# Altium PCB Sensor_Interface.PcbDoc
Units mm, origin at the board's own origin, x right, y up, seen from the top; angles counter-clockwise.
Board outline 37.26 x 27.41 mm, 2 copper layers (Top Layer, Bottom Layer), stack 1.595 mm thick; 15 components, 28 nets, 104 pads, 47 vias.
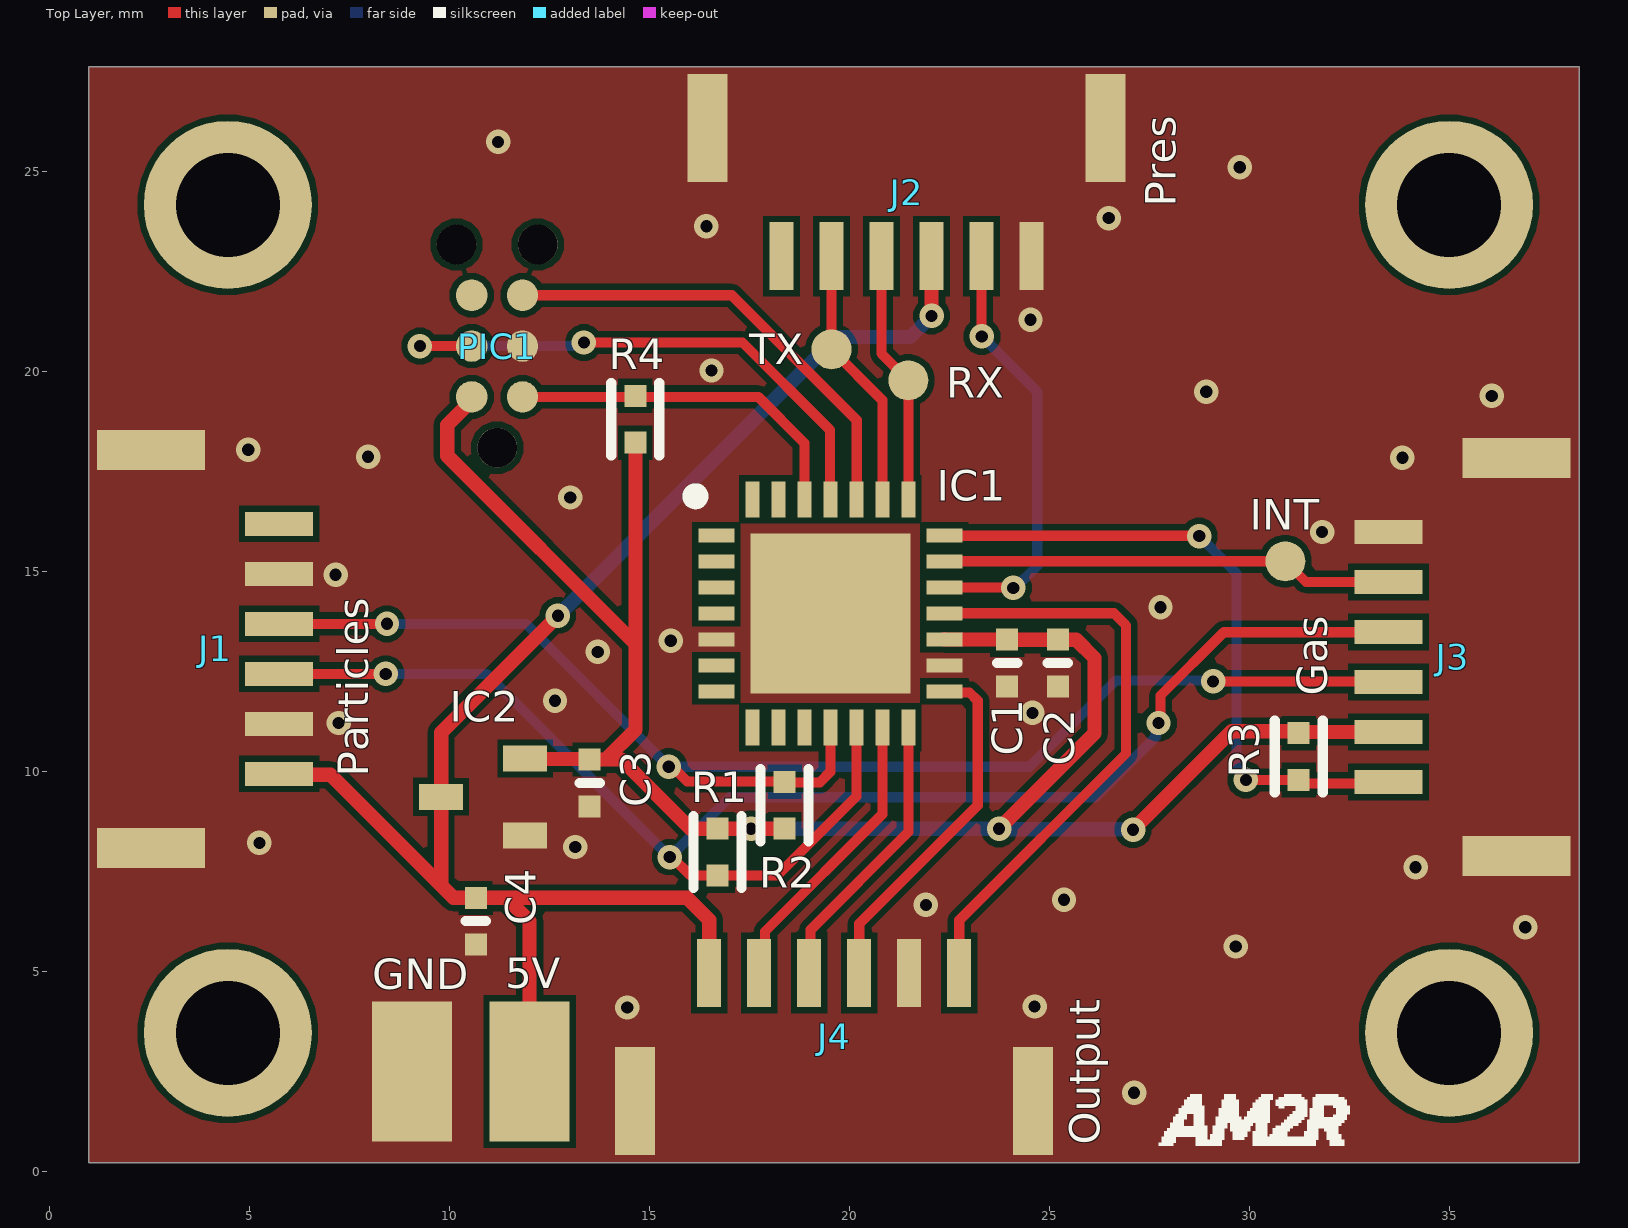
[diagram p0: Top Layer view]
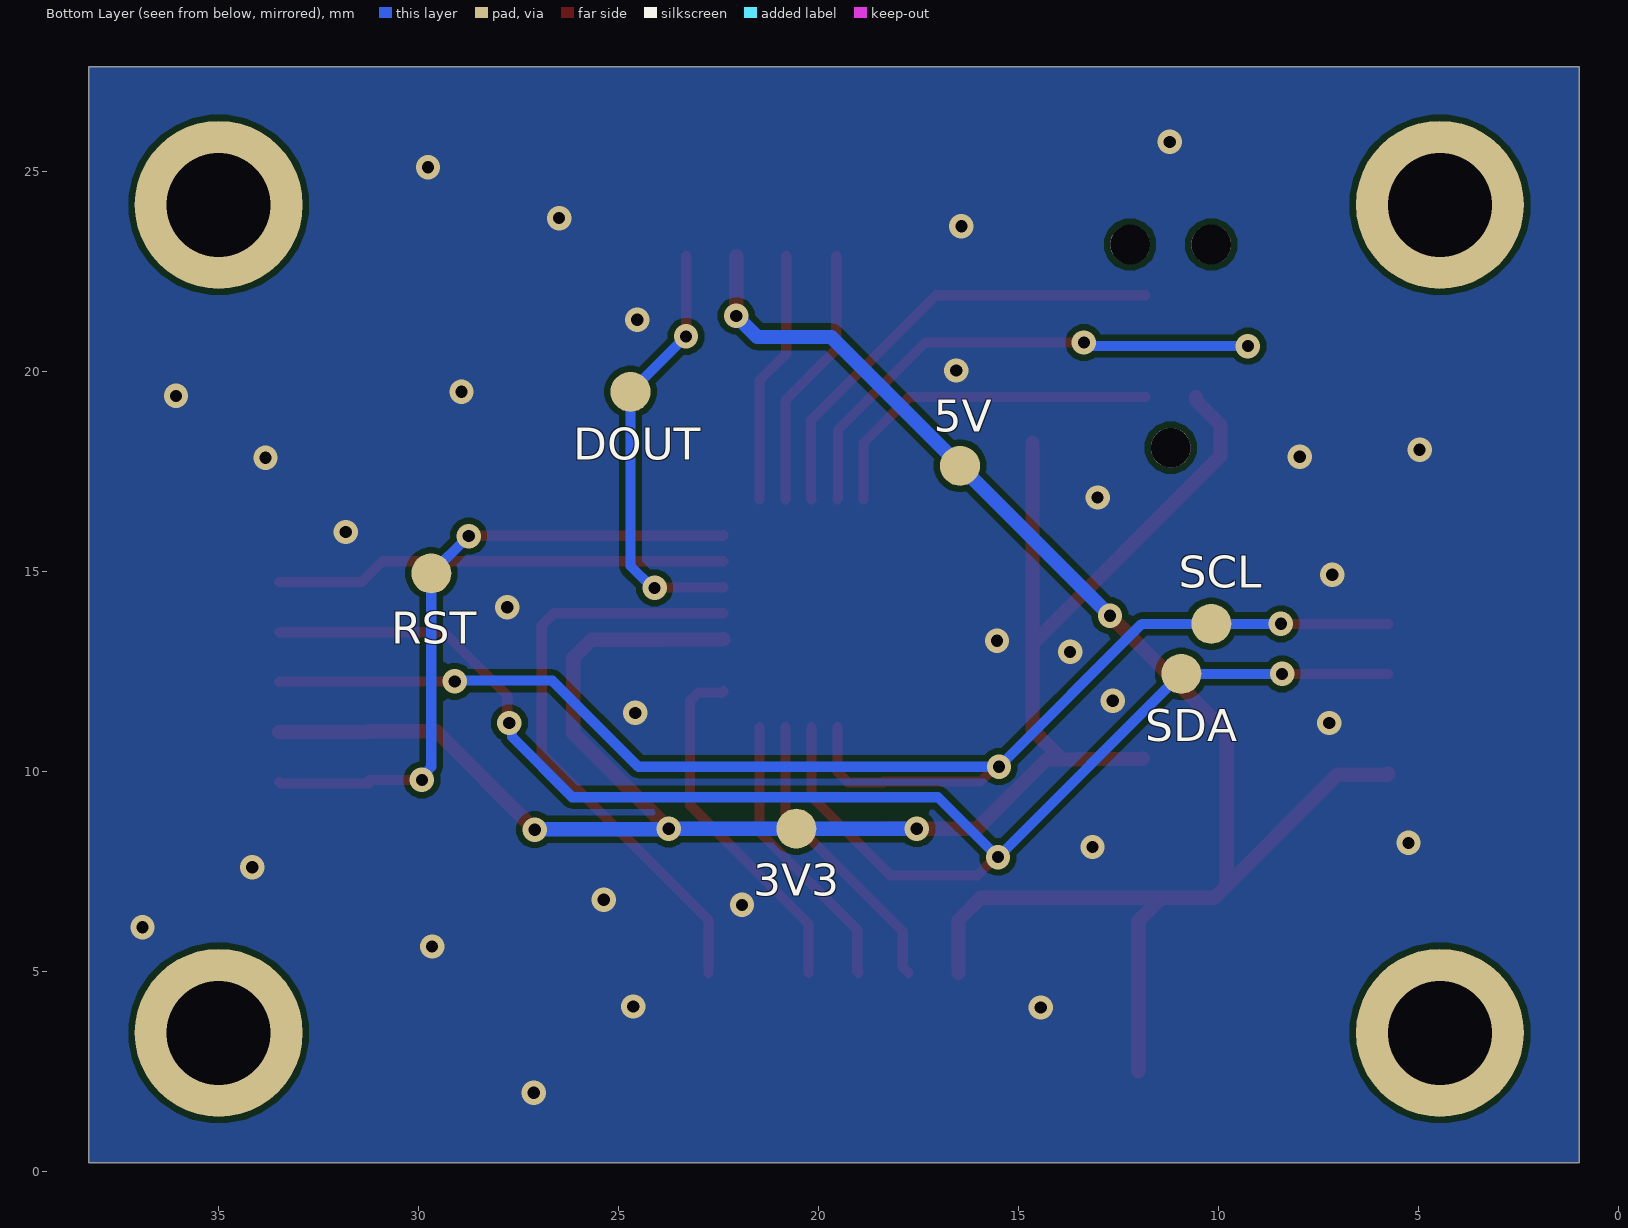
[diagram p1: Bottom Layer view, seen from below]
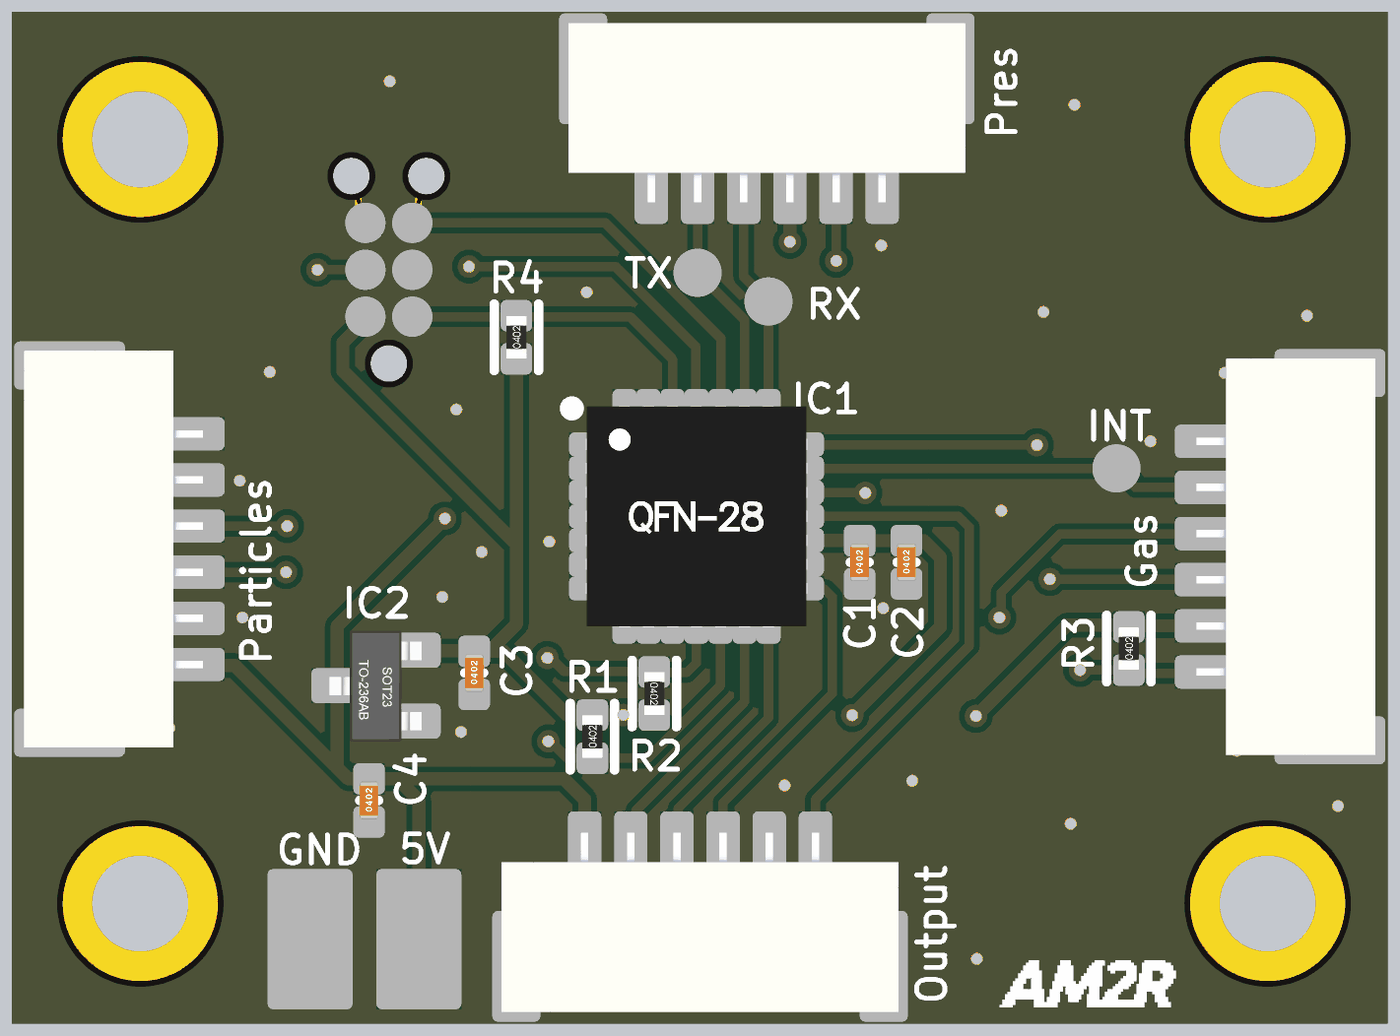
[diagram p2: 3D render of the assembled board from above, using the file's embedded part models]

## Layer stack, top to bottom
Top Solder: solder mask 0.0254, Solder Resist, Dk 3.5
Top Layer: signal copper 0.0356
Dielectric 1: core 1.524, FR-4, Dk 4.6
Bottom Layer: signal copper 0.0356
Bottom Solder: solder mask 0.0254, Solder Resist, Dk 3.5

## Board outline
0.991,0.203 38.252,0.203 38.252,27.61 0.991,27.61

## Design rules (kind name [scope] priority, off if disabled: settings)
Clearance [All] p1: gap=0.152 ignorepadtopadclearanceinfootprint=FALSE except(0: Arc-Hole Track-Hole SMDPad-Hole THPad-Hole Via-Hole Fill-Hole Poly-Hole Region-Hole Text-Hole)
ComponentClearance [All] p1: gap=0.254 collisioncheckmode=3 verticalgap=0.254 showdistances=TRUE
HoleSize [All] p1: absolutevalues=TRUE maxlimit=5.08 minlimit=0.3 maxpercent=80.000 minpercent=20.000
HoleToHoleClearance [All] p1: gap=0.55 allowstackedmicrovias=TRUE
MinimumSolderMaskSliver [All] p1: minsoldermaskwidth=0.152
PasteMaskExpansion [All] p1: expansion=0.152
PlaneConnect [All] p1: planeconnectstyle=Direct reliefexpansion=0.508 reliefentries=4 reliefconductorwidth=0.254 reliefairgap=0.254
PolygonConnect [All] p1: connectstyle=Direct reliefconductorwidth=0.254 reliefentries=4 polygonreliefangle="90 Angle" airgapwidth=0.254
RoutingTopology [All] p1: topology=Daisy_Balanced
RoutingVias [All] p1: holewidth=0.305 width=0.61 viastyle="Through Hole" minholewidth=0.305 minwidth=0.61 maxholewidth=1.27 maxwidth=2.54
SilkToBoardRegionClearance SilkToBoardRegionClearance_1 [All] p2:
SilkToSilkClearance [All] p1: silktosilkclearance=0.152
SilkToSolderMaskClearance [IsPad] p1: minsilkscreentomaskgap=0.152 clearancetoexposedcopper=TRUE
SolderMaskExpansion [All] p1: expansion=0.152 istentingtop=FALSE
Width [All] p1: maxlimit=2.54 minlimit=0.152 preferedwidth=0.254
21 further rules are at their usual default settings.

## Classes and differential pairs
component class U_MCP1700T-3302: C3 C4 IC2
component class U_PIC18F27K42-I_ML: C1 C2 IC1 IC? PIC1 PIC? R4
component class U_Connectors: J1 J2 J3 J4 R1 R2 R3

## Components (designator, comment, footprint, x,y, rotation, side; value= is the part's Value field where it differs from the comment)
C1 "0.10µF" SMD-0402C 23.952,12.7 r0 top
C2 "1µF" SMD-0402C 25.222,12.7 r0 top
C3 "1µF" SMD-0402C 13.513,9.703 r0 top
C4 "1µF" SMD-0402C 10.668,6.248 r0 top
IC1 "PIC18F27K42-I_ML" QFN28_6x6 19.533,13.945 r0 top
IC2 "MCP1700T-3302E_TT" SOT23 10.719,9.601 r180 top
J1 "SM06B-GHS-TB__LF__SN_" SM06BGHSTBLFSN 3.48,13.056 r270 top
J2 "SM06B-GHS-TB__LF__SN_" SM06BGHSTBLFSN 21.438,25.146 r180 top
J3 "SM06B-GHS-TB__LF__SN_" SM06BGHSTBLFSN 35.763,12.852 r90 top
J4 "SM06B-GHS-TB__LF__SN_" SM06BGHSTBLFSN 19.63,2.678 r0 top
PIC1 "TC2030-CTX-NL" TC2030 11.402,20.625 r90 top
R1 "10k" SMD-0402-RES 16.713,7.976 r0 top
R2 "10k" SMD-0402-RES 18.39,9.144 r180 top
R3 "10k" SMD-0402-RES 31.242,10.363 r0 top
R4 "4.7k" SMD-0402-RES 14.656,18.796 r0 top

## Footprints (in the part's own frame and the unit in brackets; to place one, negate y for a bottom-side part, rotate by r counter-clockwise, add the part's x,y. Pads: shape width x height; smd on the part's side, far side on the other; paste and mask are expansions set on the pad)
QFN28_6x6 [mm]
  rect 0.9x0.35 smd: 1(-2.85,1.95) 2(-2.85,1.3) 3(-2.85,0.65) 4(-2.85,0) 5(-2.85,-0.65) 6(-2.85,-1.3) 7(-2.85,-1.95) 15(2.85,-1.95) 16(2.85,-1.3) 17(2.85,-0.65) 18(2.85,0) 19(2.85,0.65) 20(2.85,1.3) 21(2.85,1.95)
  rect 0.35x0.9 smd: 8(-1.95,-2.85) 9(-1.3,-2.85) 10(-0.65,-2.85) 11(0,-2.85) 12(0.65,-2.85) 13(1.3,-2.85) 14(1.95,-2.85) 22(1.95,2.85) 23(1.3,2.85) 24(0.65,2.85) 25(0,2.85) 26(-0.65,2.85) 27(-1.3,2.85) 28(-1.95,2.85)
  rect 4x4 smd: 29(0,0)
  silkscreen extent -3.54,2.76 -3.21,3.09, body extent -3,-3 3,3, height 1.02
SM06BGHSTBLFSN [mm]
  rect 0.6x1.7 smd: 1(3.125,2.275) 2(1.875,2.275) 3(0.625,2.275) 4(-0.625,2.275) 5(-1.875,2.275) 6(-3.125,2.275)
  rect 1x2.7 smd: MP1(4.975,-0.925) MP2(-4.975,-0.925)
  body extent -5.38,-2.16 5.38,2.69, height 4.27
SMD-0402-RES [mm]
  rect 0.55x0.55 smd: 1(0,0.584) 2(0,-0.584)
  silkscreen extent -0.6,-0.9 0.6,0.9, body extent -0.28,-0.57 0.27,0.58, height 0.41
SMD-0402C [mm]
  rect 0.55x0.55 smd: 1(0,0.584) 2(0,-0.584)
  silkscreen extent -0.25,0 0.25,0, body extent -0.25,-0.51 0.25,0.51, height 0.51
SOT23 [mm]
  rect 1.1x0.65 smd: 1(-1.184,1.206) 2(-1.184,-0.714) 3(0.916,0.246)
  body extent -1.38,-1.25 1.12,1.75, height 1.09
TC2030 [mm]
  rrect100% 0.787x0.787 smd: 1(-1.27,-0.434) 2(-1.27,0.836) 3(0,-0.434) 4(0,0.836) 5(1.27,-0.434) 6(1.27,0.836)
  round 0.991 hole 0.991 unplated: MH1(-2.54,0.201) MH2(2.54,1.217) MH3(2.54,-0.815)

## Part data
C1: library part GCM155R71C104KA55D, "CAP CER 0.1UF 16V X7R 0402", Digi-Key Part Number=490-4759-1-ND, Manufacturer="Murata Electronics North America", Operating Temperature="-55°C ~ 125°C", Package / Case="0402 (1005 Metric)", Ratings=AEC-Q200, Temperature Coefficient=X7R, Tolerance=±10%, Voltage=16V, @ qty=0, Applications=Automotive, Datasheets=http://www.murata.com/~/media/webrenewal/support/library/catalog/products/capacitor/mlcc/c03e.ashx, Factory Stock=0, Features=-, Height - Seated (Max)=-, Image=//media.digikey.com/Renders/Murata%20Renders/ZRB-SERIES-0402.jpg, Lead Spacing=-, Lead Style=-, Minimum Quantity=1, Mounting Type="Surface Mount, MLCC", Packaging="Cut Tape (CT)", Part Number=GCM155R71C104KA55D, Part Status=Active, Quantity Available=734194, Series=GCM, Size / Dimension="0.039\" L x 0.020\" W (1.00mm x 0.50mm)", Thickness (Max)="0.022\" (0.55mm)", Unit Price (USD)=0.1
C2 C3 C4: library part GCM155C71A105KE38D, "CAP CER 1UF 10V X7S 0402", Digi-Key Part Number=490-13409-1-ND, Manufacturer="Murata Electronics North America", Operating Temperature="-55°C ~ 125°C", Package / Case="0402 (1005 Metric)", Ratings=AEC-Q200, Temperature Coefficient=X7S, Tolerance=±10%, Voltage=10V, @ qty=0, Applications=Automotive, Datasheets=http://www.murata.com/~/media/webrenewal/support/library/catalog/products/capacitor/mlcc/c03e.ashx, Factory Stock=0, Features=-, Height - Seated (Max)=-, Image=//media.digikey.com/Renders/Murata%20Renders/ZRB-SERIES-0402.jpg, Lead Spacing=-, Lead Style=-, Minimum Quantity=1, Mounting Type="Surface Mount, MLCC", Packaging="Cut Tape (CT)", Part Number=GCM155C71A105KE38D, Part Status=Active, Quantity Available=7240, Series=GCM, Size / Dimension="0.039\" L x 0.020\" W (1.00mm x 0.50mm)", Thickness (Max)="0.022\" (0.55mm)", Unit Price (USD)=0.12
IC1: "8-bit Microcontrollers", Manufacturer_Name=Microchip, Manufacturer_Part_Number=PIC18F27K42-I/ML, DeviceSetName=PIC18F27K42-I_ML, GateName_1=G$1, Height=1mm, LibraryName=PIC18F27K42-I_ML, Mouser_Part_Number=579-PIC18F27K42-I/ML, Mouser_Price-Stock=https://www.mouser.com/Search/Refine.aspx?Keyword=579-PIC18F27K42-I%2FML, SymbolName_1=PIC18F27K42-I_ML
IC2: library part MCP1700T-3302, "LDO Voltage Regulator 250mA 3.3V", Manufacturer_Name=Microchip, Manufacturer_Part_Number=MCP1700T-3302E/TT, Allied_Number=70046119, Allied_Price-Stock=http://www.alliedelec.com/microchip-technology-inc-mcp1700t-3302e-tt/70046119/, DeviceSetName=MCP1700T-3302E_TT, GateName_1=G$1, Height=1.12mm, LibraryName=MCP1700T-3302E_TT, Mouser_Part_Number=579-MCP1700T3302E/TT, Mouser_Price-Stock=https://www.mouser.com/Search/Refine.aspx?Keyword=579-MCP1700T3302E%2FTT, RS_Part_Number=6989044P, RS_Price-Stock=http://uk.rs-online.com/web/p/products/6989044P, SymbolName_1=MCP1700T-3302E_TT
J1 J2 J3 J4: "Conn Shrouded Header HDR 6 POS 1.25mm Solder RA Side Entry SMD T/R   Source:  Datasheet", Manufacturer_Name="JST (JAPAN SOLDERLESS TERMINALS)", Manufacturer_Part_Number="SM06B-GHS-TB (LF)(SN)", Arrow_Part_Number="SM06B-GHS-TB (LF)(SN)", Arrow_Price-Stock=https://www.arrow.com/en/products/sm06b-ghs-tb-lf-sn/jst-manufacturing, DeviceSetName=SM06B-GHS-TB__LF__SN_, GateName_1=G$1, Height=4.25mm, LibraryName=SM06B-GHS-TB__LF__SN_, SymbolName_1=SM06B-GHS-TB__LF__SN_
PIC1: "6-Pin \"No Legs\" Cable with 10-pin micro-connector for Cortex processors", Manufacturer_Name="Tag Connect", DeviceSetName=TC2030-CTX-NL, GateName_1=G$1, Height=18mm, LibraryName=TC2030-CTX-NL, Manufacturer_Part_Number=TC2030-CTX-NL, SymbolName_1=TC2030-CTX-NL
R1 R2 R3: library part ERJ-2GEJ103X, "RES SMD 10K OHM 5% 1/10W 0402", Digi-Key Part Number=P10KJCT-ND, Manufacturer="Panasonic Electronic Components", Operating Temperature="-55°C ~ 155°C", Package / Case="0402 (1005 Metric)", Power (Watts)="0.1W, 1/10W", Supplier Device Package=0402, Temperature Coefficient=±200ppm/°C, Tolerance=±5%, @ qty=1500, Composition="Thick Film", Datasheets=http://industrial.panasonic.com/www-cgi/jvcr13pz.cgi?E+PZ+3+AOA0001+ERJ2GEJ103X+7+WW, Factory Stock=0, Failure Rate=-, Features="Automotive AEC-Q200", Height - Seated (Max)="0.016\" (0.40mm)", Image=//media.digikey.com/Photos/Panasonic%20Photos/ERJ-PA2-Series.jpg, Minimum Quantity=1, Number of Terminations=2, Packaging="Cut Tape (CT)", Part Number=ERJ-2GEJ103X, Part Status=Active, Quantity Available=2560215, Series=ERJ, Size / Dimension="0.039\" L x 0.020\" W (1.00mm x 0.50mm)", Unit Price (USD)=0.00350
R4: library part ERJ-2RKF4701X, "RES SMD 4.7K OHM 1% 1/10W 0402", Digi-Key Part Number=P4.70KLCT-ND, Manufacturer="Panasonic Electronic Components", Operating Temperature="-55°C ~ 155°C", Package / Case="0402 (1005 Metric)", Power (Watts)="0.1W, 1/10W", Supplier Device Package=0402, Temperature Coefficient=±100ppm/°C, Tolerance=±1%, @ qty=1500, Composition="Thick Film", Datasheets=http://industrial.panasonic.com/www-cgi/jvcr13pz.cgi?E+PZ+3+AOA0002+ERJ2RKF4701X+7+WW, Factory Stock=0, Failure Rate=-, Features="Automotive AEC-Q200", Height - Seated (Max)="0.016\" (0.40mm)", Image=//media.digikey.com/Photos/Panasonic%20Photos/ERJ-PA2-Series.jpg, Minimum Quantity=1, Number of Terminations=2, Packaging="Cut Tape (CT)", Part Number=ERJ-2RKF4701X, Part Status=Active, Quantity Available=1881807, Series=ERJ, Size / Dimension="0.039\" L x 0.020\" W (1.00mm x 0.50mm)", Unit Price (USD)=0.00496

## Free pads (board coordinates)
  round 4.2 hole 2.6: 3(4.47,3.454) 3(4.47,24.155) 3(35.001,3.454) 3(35.001,24.155)
  rrect100% 1x1 smd far side: 4(10.185,13.681) 4(10.937,12.431) 4(16.469,17.632) 4(20.56,8.56) 4(24.706,19.48) 4(29.686,14.942)
  rrect100% 1x1 smd: 4(19.563,20.544) 4(21.483,19.767) 4(30.907,15.245)
  rect 2x3.5 smd: 5(9.068,2.489) 5(12.014,2.489)

## Via types
v1: diameter 0.61, hole 0.305, Top Layer to Bottom Layer, tented both sides, 47 vias

## Nets (pads, with @x,y where several pads share a name; then routed paths per layer and width w, separated by ;. In a path a pad name is that pad's centre, name@x,y a point inside that pad or via, vN(x,y) a via of type N, cw(c..) or ccw(c..) an arc to the next point about the centre after c; other vN are vias at no path point)
3V3: C1.1 C2.1 C3.1 IC1.17 IC2.2 J3.5 pad.4@20.56,8.56 PIC1.2 R1.1 R2.1 R3.1 R4.2 | length 50
  Top Layer w0.356: PIC1.2 10.566,19.263 9.957,18.654 9.957,17.882 14.658,13.18 ; IC2.2 11.917,10.301 13.499,10.301 C3.1 13.911,10.287 ; R4.2@14.658,18.212 14.658,13.18 ; R2.1 v1(17.551,8.56) R1.1 16.036,8.56 14.309,10.287 13.911,10.287 ; IC1.17 22.385,13.292 23.945,13.292 C1.1 C2.1 25.681,13.284 26.137,12.829 26.137,10.943 v1(23.751,8.558) ; v1(27.102,8.534) 29.566,10.998 R3.1@31.242,10.998 ; R3.1@31.272,10.977 J3.5 ; 13.911,10.287 14.658,11.034 14.658,13.18
  Bottom Layer w0.356: v1(17.551,8.56) 20.56,8.56 23.569,8.56 23.572,8.558 v1(23.751,8.558) 23.763,8.546 27.09,8.546 v1(27.102,8.534)
5V: C4.1 IC2.3 J1.1 J2.4 J4.6 pad.4@16.469,17.632 pad.5@12.014,2.489 | length 40
  Top Layer w0.356: J1.1 5.78,9.906 7.036,9.906 10.109,6.833 C4.1 11.43,6.833 ; 9.803,7.241 IC2.3 9.803,10.966 v1(12.721,13.884) ; pad.5@12.014,2.489 12.014,6.248 11.43,6.833 ; J4.6 16.505,6.279 15.951,6.833 11.43,6.833 ; v1(22.063,21.38) J2.4
  Bottom Layer w0.356: v1(12.721,13.884) 16.469,17.632 19.69,20.853 21.536,20.853 v1(22.063,21.38)
ALR: IC1.13 J4.5 | length 7.4
  Top Layer w0.254: J4.5 17.901,5.099 17.901,5.988 20.833,8.92 IC1.13
DOUT: IC1.19 J2.5 pad.4@24.706,19.48 | length 10.9
  Top Layer w0.254: IC1.19 22.39,14.587 24.097,14.587 v1(24.105,14.58) ; v1@23.313,20.867 J2.5
  Bottom Layer w0.254: v1(23.318,20.867) 24.706,19.48 24.706,15.128 24.158,14.58 v1(24.105,14.58)
GND: C1.2 C2.2 C3.2 C4.2 IC1.5 IC1.16 IC1.29 IC2.1 J1.2 J1.5 J1.MP1 J1.MP2 J2.6 J2.MP1 J2.MP2 J3.1 J3.MP1 J3.MP2 J4.2 J4.MP1 J4.MP2 pad.5@9.068,2.489 PIC1.3
  other v1: 27.127,1.956 14.453,4.089 24.638,4.115 29.667,5.613 36.906,6.096 21.92,6.655 25.375,6.782 34.163,7.595 13.157,8.103 5.258,8.204 7.239,11.201 24.587,11.455 12.649,11.76 13.716,12.979 15.545,13.259 27.788,14.097 7.163,14.91 31.826,15.977 13.03,16.84 33.833,17.831 7.976,17.856 4.978,18.034 36.068,19.38 28.931,19.482 16.561,20.015 24.536,21.285 16.434,23.622 26.492,23.825 29.769,25.095 11.227,25.73
INT: IC1.20 J3.2 pad.4@30.907,15.245 | length 11.3
  Top Layer w0.254: IC1.20 30.907,15.245 31.424,14.727 J3.2
MCLR: IC1.26 PIC1.1 R4.1 | length 8.9
  Top Layer w0.254: PIC1.1 17.729,19.355 18.883,18.201 IC1.26
PGC: IC1.24 PIC1.5 | length 11.6
  Top Layer w0.254: PIC1.5 17.069,21.895 20.193,18.771 20.193,16.805 IC1.24
PGD: IC1.25 PIC1.4 | length 14.2
  Top Layer w0.254: v1(9.271,20.625) PIC1.4 ; v1(13.371,20.713) 17.336,20.713 19.52,18.529 19.52,16.807 IC1.25
  Bottom Layer w0.254: v1(9.271,20.625) 13.187,20.625 13.275,20.713 v1(13.371,20.713)
RA0: IC1.27
RA1: IC1.28
RA2: IC1.1
RA3: IC1.2
RA4: IC1.3
RA5: IC1.4
RA6: IC1.7
RA7: IC1.6
RB0: IC1.18 J4.1 | length 15.1
  Top Layer w0.254: IC1.18 26.623,13.945 26.924,13.643 26.924,10.439 22.755,6.27 J4.1
RB3: IC1.21 J3.6 pad.4@29.686,14.942 R3.2 | length 16.5
  Top Layer w0.254: IC1.21 22.392,15.885 28.743,15.885 v1(28.753,15.875) ; v1(29.921,9.779) R3.2 ; R3.2@31.242,9.69 33.45,9.69 J3.6
  Bottom Layer w0.254: v1(28.753,15.875) 29.686,14.942 29.686,10.101 29.921,9.866 v1(29.921,9.779)
RB4: IC1.22 J2.3 pad.4@21.483,19.767 | length 6.4
  Top Layer w0.254: J2.3 20.813,20.437 21.483,19.767 IC1.22
RB5: IC1.23 J2.2 pad.4@19.563,20.544 | length 6.6
  Top Layer w0.254: J2.2 19.563,20.544 20.833,19.274 20.833,16.824 20.818,16.809 IC1.23
RC0: IC1.8
RC1: IC1.9
RC2: IC1.10
RC3: IC1.11 J1.4 J3.4 pad.4@10.185,13.681 R2.2 | length 35.5
  Top Layer w0.254: J1.4 v1(8.447,13.681) ; v1(15.494,10.109) 15.588,10.109 15.956,9.741 18.377,9.741 R2.2 ; R2.2@18.39,9.716 19.266,9.716 19.533,9.982 IC1.11 ; v1(29.102,12.243) 29.11,12.235 33.48,12.235 J3.4
  Bottom Layer w0.254: v1(8.447,13.681) 10.185,13.681 11.923,13.681 v1(15.494,10.109) 24.511,10.109 26.662,12.26 29.084,12.26 v1(29.102,12.243)
RC4: IC1.12 J1.3 J3.3 pad.4@10.937,12.431 R1.2 | length 39.9
  Top Layer w0.254: J1.3 v1(8.417,12.431) ; v1(15.519,7.849) 15.575,7.849 16.032,7.391 R1.2 18.212,7.391 20.183,9.362 IC1.12 ; v1(27.737,11.201) 27.788,11.252 27.788,11.887 29.37,13.47 33.48,13.47 J3.3
  Bottom Layer w0.254: v1@8.427,12.431 10.937,12.431 v1(15.519,7.849) 17.018,9.347 26.162,9.347 27.669,10.854 27.669,11.133 v1(27.737,11.201)
RC6: IC1.14 J4.4 | length 7.2
  Top Layer w0.254: J4.4 19.04,4.988 19.04,6.035 21.483,8.478 IC1.14
RC7: IC1.15 J4.3 | length 9
  Top Layer w0.254: J4.3 20.255,6.183 23.216,9.144 23.216,11.76 23.01,11.966 22.411,11.966 IC1.15
pads on no net: J1.6 J2.1 PIC1.6 PIC1.MH1 PIC1.MH2 PIC1.MH3

## Polygon pours and split planes (outlines as drawn)
GND on Top Layer "TopLayer-GND" (solid, pour order 0): 0.991,0.203 38.252,0.203 38.252,27.61 0.991,27.61
GND on Bottom Layer "BottomLayer-GND" (solid, pour order 1): 0.991,0.203 38.252,0.203 38.252,27.61 0.991,27.61

## Silkscreen, mask and mechanical layers (free items; w line width, h text height)
Top Overlay:
  region: 184 vertices and 2 holes, not listed, extent 27.744,0.639 32.518,1.922
  text "Pres" at 28.169,24.105 h0.76 r90
  text "TX" at 17.501,20.168 h0.76
  text "RX" at 22.428,19.329 h0.76
  text "INT" at 30.023,16.027 h0.76
  text "Gas" at 31.953,11.887 h0.76 r90
  text "Particles" at 7.976,9.855 h0.76 r90
  text "5V" at 11.405,4.572 h0.76
  text "GND" at 8.077,4.547 h0.76
  text "Output" at 26.264,0.66 h0.76 r90
Bottom Overlay:
  text "5V" at 17.122,18.489 h0.8
  text "DOUT" at 26.139,17.778 h0.8
  text "SCL" at 11.001,14.577 h0.8
  text "RST" at 30.686,13.18 h0.8
  text "SDA" at 11.839,10.742 h0.8
  text "3V3" at 21.643,6.881 h0.8
Top Solder:
  rectangle: 11.913,22.327 12.09,22.631
  rectangle: 10.287,22.327 10.465,22.581
  rectangle: 17.272,11.659 21.793,16.205
Outline:
  the board outline again, w0.1